# Altium PCB PCB2.PcbDoc
Units mm, origin at the board's own origin, x right, y up, seen from the top; angles counter-clockwise.
Board outline 40 x 60 mm, 4 copper layers (Top Layer 1, GND, PWR, Bottom Layer 1), stack 1.564 mm thick; 9 components, 9 nets, 136 pads, 0 vias.
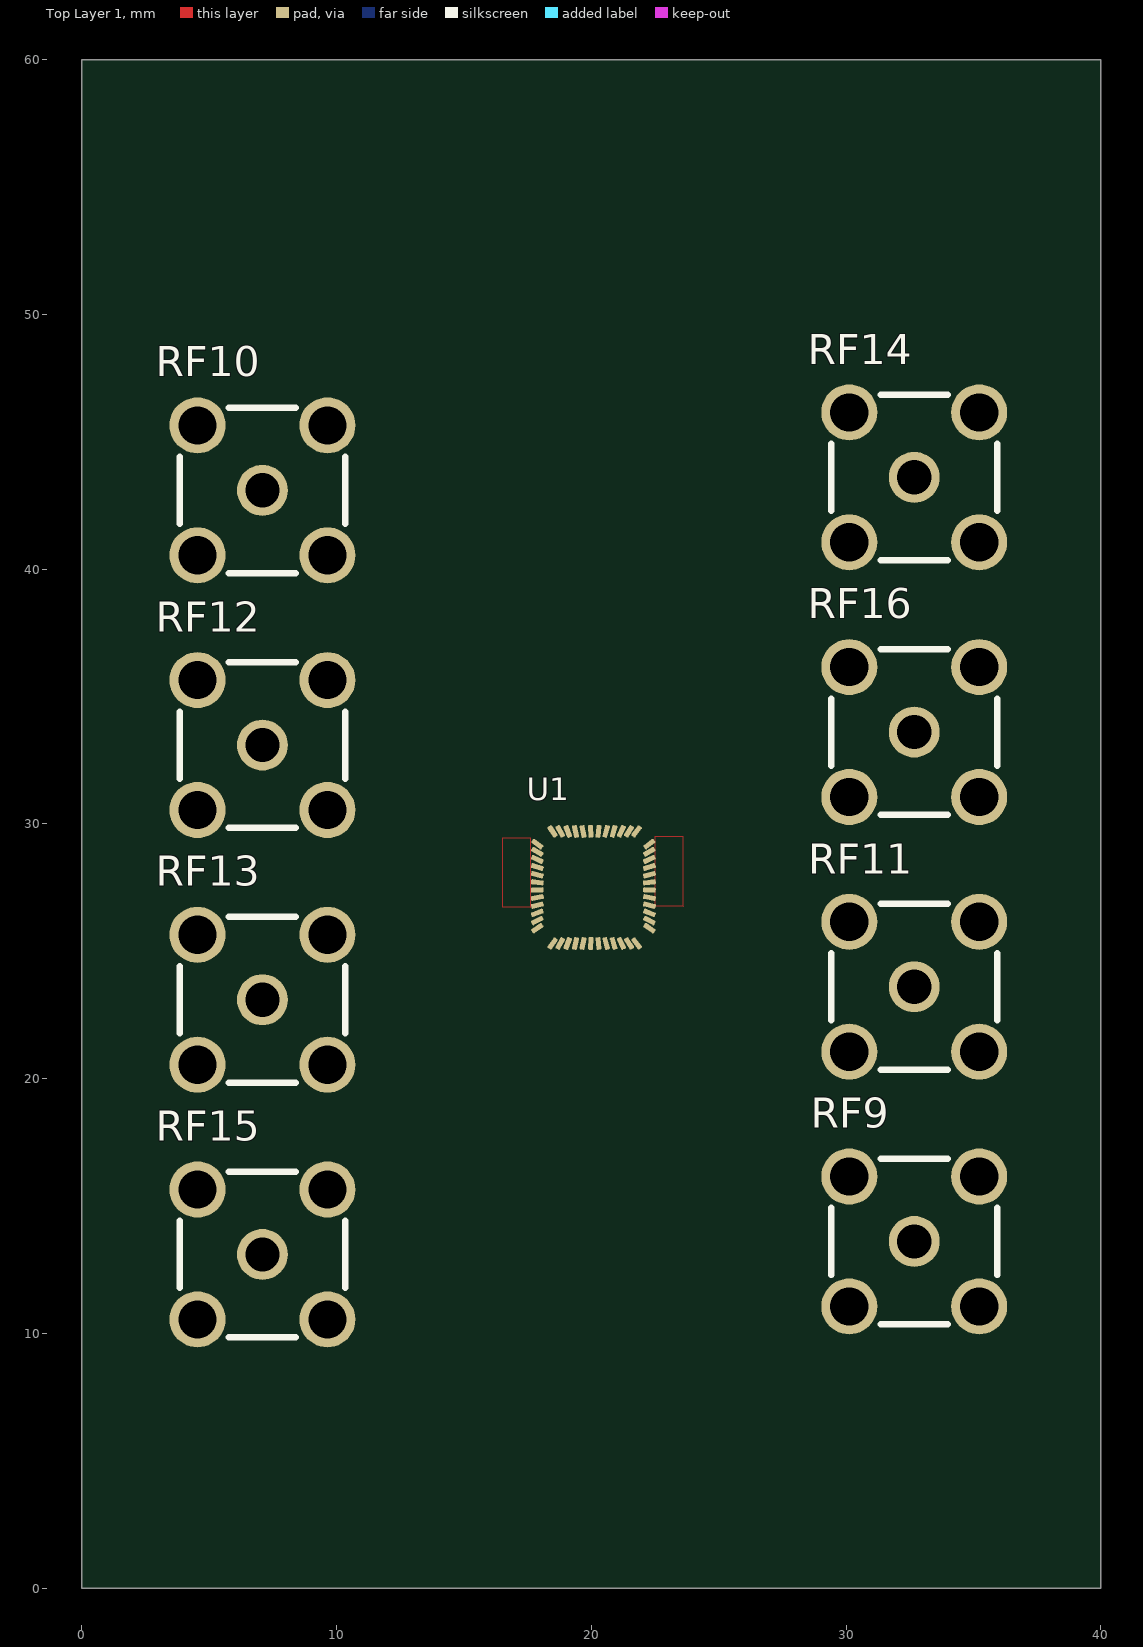
[diagram p0: Top Layer 1 view]
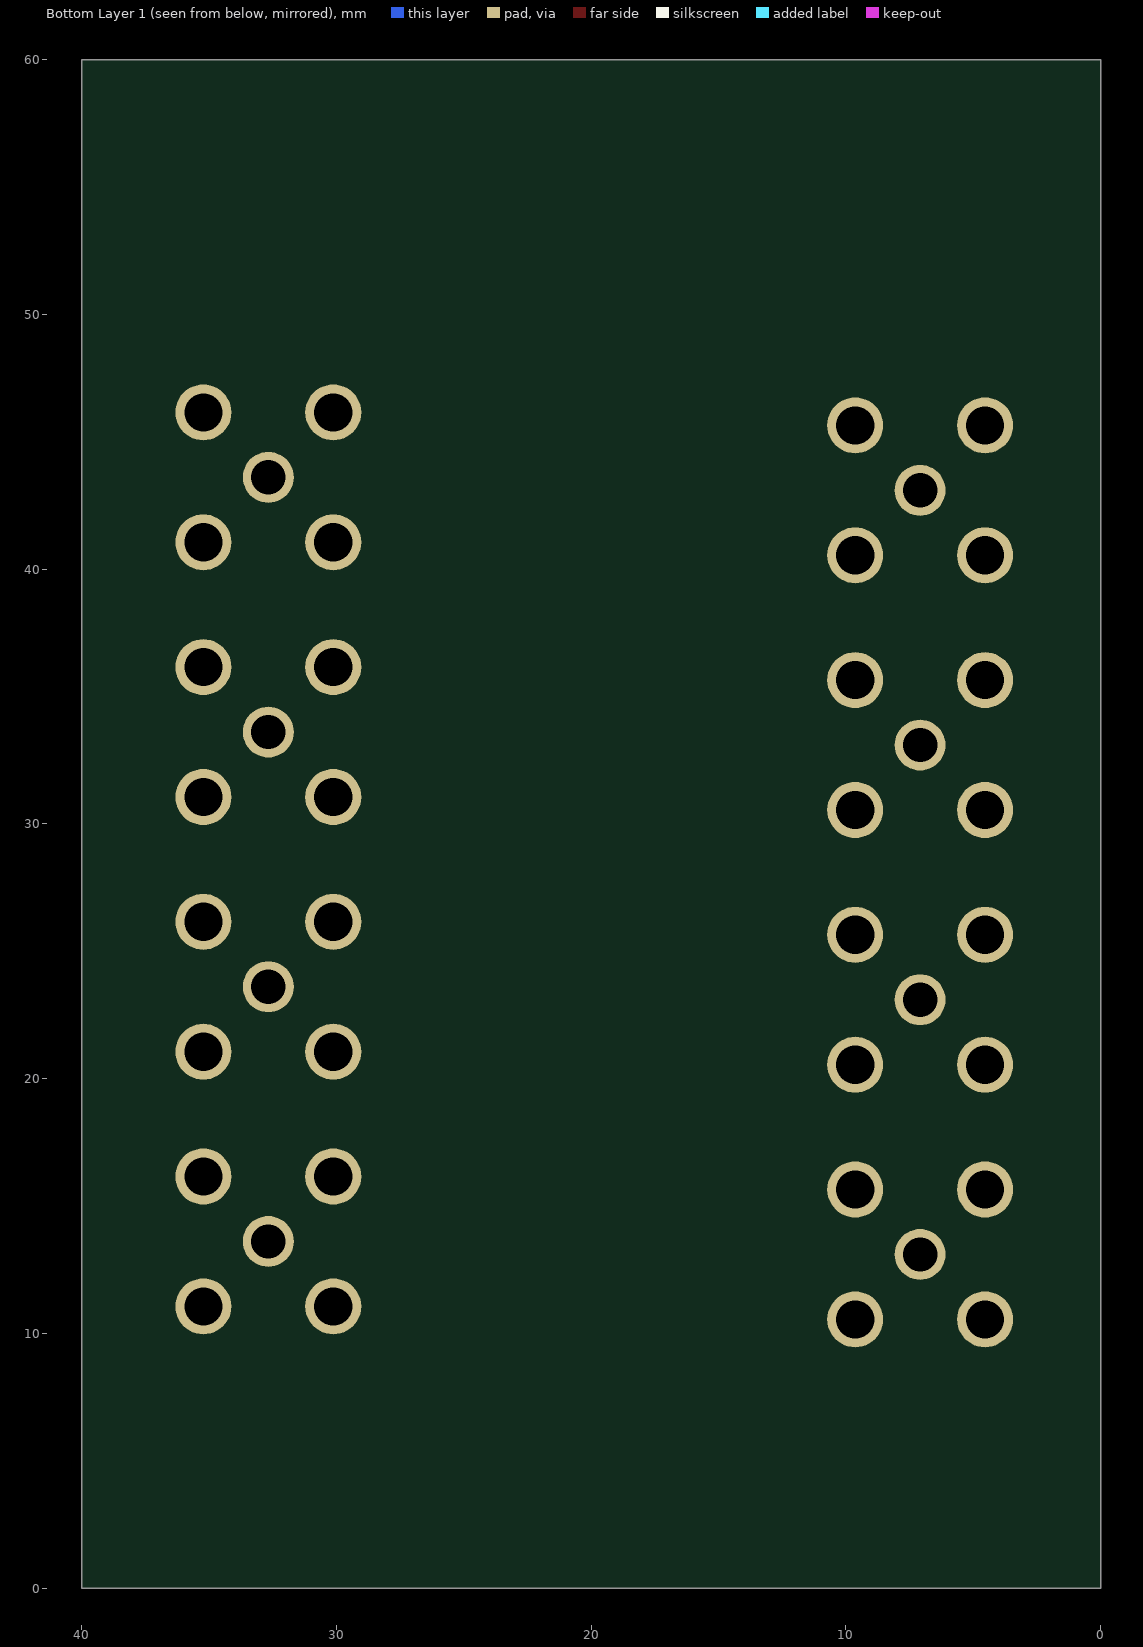
[diagram p1: Bottom Layer 1 view, seen from below]
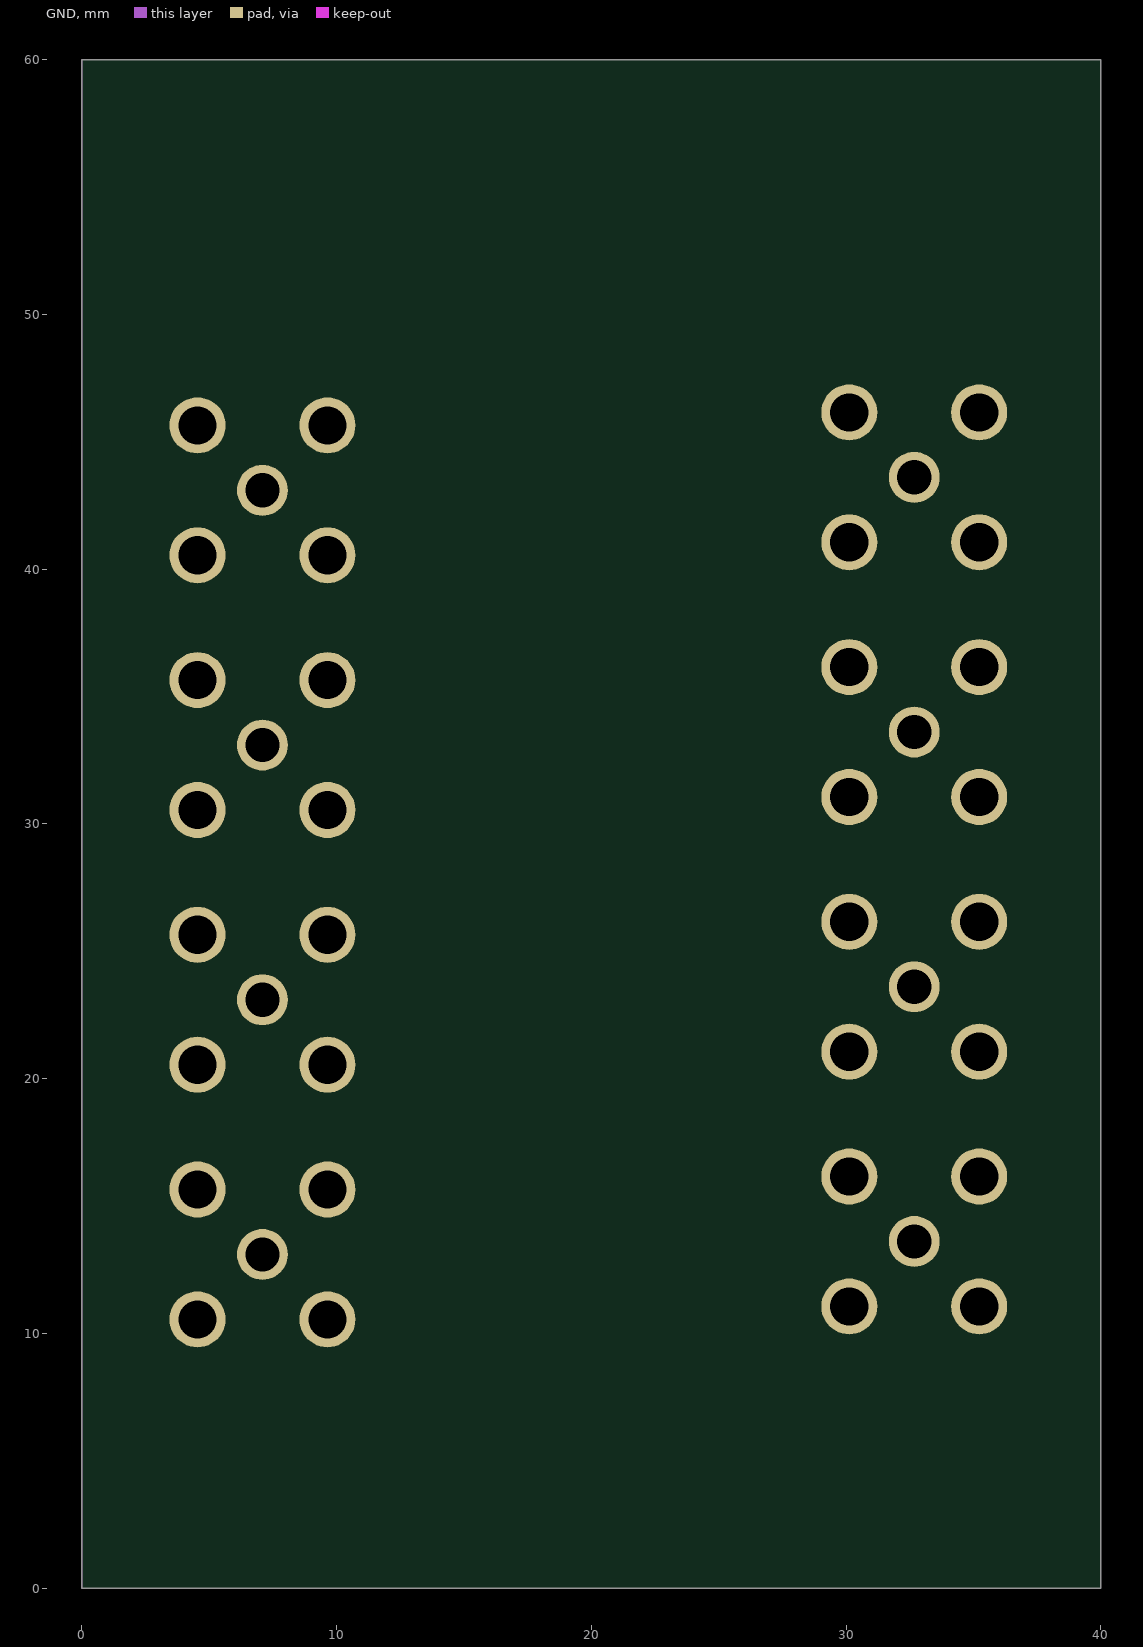
[diagram p2: GND]
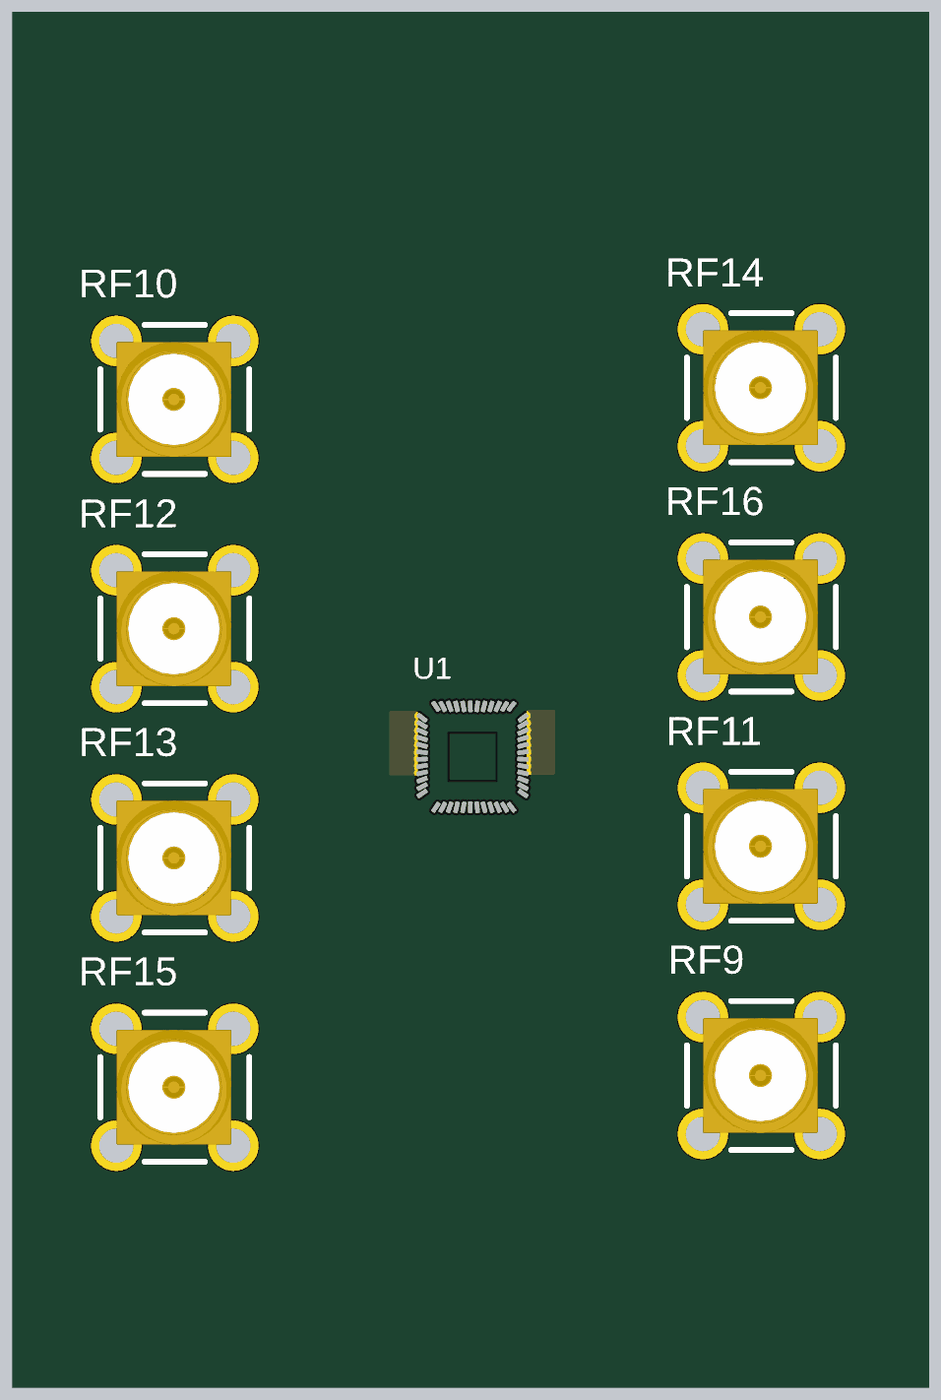
[diagram p3: 3D render of the assembled board from above, using the file's embedded part models]

## Layer stack, top to bottom
Top Solder: solder mask 0.0102, Solder Resist, Dk 3.5
Top Layer 1: signal copper 0.035
Dielectric 2: prepreg 0.0994, PP-006, Dk 4.1
GND: signal copper 0.0152
Dielectric 1: dielectric 1.265, FR-4, Dk 4.8
PWR: signal copper 0.0152
Dielectric 3: prepreg 0.0994, PP-006, Dk 4.1
Bottom Layer 1: signal copper 0.035
Bottom Solder: solder mask 0.0102, Solder Resist, Dk 3.5

## Board outline
0,0 0,60 40,60 40,0

## Design rules (kind name [scope] priority, off if disabled: settings)
Clearance [All] p1: gap=0.001 ignorepadtopadclearanceinfootprint=FALSE
DiffPairsRouting [All] p1: maxlimit=0.254 minlimit=0.203 mostfreqgap=0.203 toplayer_minwidth=0.001 toplayer_maxwidth=0.124 toplayer_prefwidth=0.124 midlayer1_minwidth=0.001 midlayer1_maxwidth=0.124 midlayer1_prefwidth=0.124 midlayer2_minwidth=0.001 midlayer2_maxwidth=0.124 midlayer2_prefwidth=0.124 bottomlayer_minwidth=0.001 bottomlayer_maxwidth=0.124 bottomlayer_prefwidth=0.124 maxuncoupledlength=12.7
PlaneConnect [All] p1: planeconnectstyle=Direct reliefexpansion=0.508 reliefentries=4 reliefconductorwidth=0.254 reliefairgap=0.254
PolygonConnect [All] p1: connectstyle=Direct reliefconductorwidth=0.254 reliefentries=4 polygonreliefangle="90 Angle" airgapwidth=0.254
RoutingVias [All] p1: holewidth=0.711 width=1.27 viastyle="Through Hole" minholewidth=0.08 minwidth=0.1 maxholewidth=0.711 maxwidth=1.27
SolderMaskExpansion [All] p1: expansion=0.102 istentingtop=FALSE
SupplyNets "Schematic Supply Nets" [InNet('GND')] p1: voltage=0.000
Width SMA [All] p1: maxlimit=0.156 minlimit=0.156 preferedwidth=0.156
Width [All] p2: maxlimit=0.254 minlimit=0.1 preferedwidth=0.254
28 further rules are at their usual default settings.

## Classes and differential pairs
differential pair R2: +R2_P -R2_N
differential pair R1: +R1_P -R1_N

## Components (designator, comment, footprint, x,y, rotation, side; value= is the part's Value field where it differs from the comment)
RF9 "BWSMA-KE-Z001" SMA-TH_BWSMA-KE-Z001 32.68,13.61 r0 top
RF10 "BWSMA-KE-Z001" SMA-TH_BWSMA-KE-Z001 7.09,43.1 r0 top
RF11 "BWSMA-KE-Z001" SMA-TH_BWSMA-KE-Z001 32.68,23.61 r0 top
RF12 "BWSMA-KE-Z001" SMA-TH_BWSMA-KE-Z001 7.09,33.1 r0 top
RF13 "BWSMA-KE-Z001" SMA-TH_BWSMA-KE-Z001 7.09,23.1 r0 top
RF14 "BWSMA-KE-Z001" SMA-TH_BWSMA-KE-Z001 32.68,43.61 r0 top
RF15 "BWSMA-KE-Z001" SMA-TH_BWSMA-KE-Z001 7.09,13.1 r0 top
RF16 "BWSMA-KE-Z001" SMA-TH_BWSMA-KE-Z001 32.68,33.61 r0 top
U1 "chip2" CHIP2 19.18,28.21 r0 top

## Footprints (in the part's own frame and the unit in brackets; to place one, negate y for a bottom-side part, rotate by r counter-clockwise, add the part's x,y. Pads: shape width x height; smd on the part's side, far side on the other; paste and mask are expansions set on the pad)
CHIP2 [mm]
  rrect50% 0.5x0.2 smd rot 142.43: 1(-1.3,1)
  rect 0.1x0.05 on Mech16 mask+0.102: 1(0,0) 2(0,-0.1) 3(0,-0.2) 4(0,-0.3) 5(0,-0.55) 6(0,-0.65) 7(0,-0.75) 8(0,-0.85) 9(0,-1.1) 10(0,-1.2) 11(0,-1.3) 12(0,-1.4) 25(1.8,-1.4) 26(1.8,-1.3) 27(1.8,-1.2) 28(1.8,-1.1) 29(1.8,-0.85) 30(1.8,-0.75) 31(1.8,-0.65) 32(1.8,-0.55) 33(1.8,-0.3) 34(1.8,-0.2) 35(1.8,-0.1) 36(1.8,0)
  rrect50% 0.5x0.2 smd rot 148.27: 2(-1.3,0.7)
  rrect50% 0.5x0.2 smd rot 155.09: 3(-1.3,0.4)
  rrect50% 0.5x0.2 smd rot 162.81: 4(-1.3,0.1)
  rrect50% 0.5x0.2 smd rot 164.93: 5(-1.3,-0.2)
  rrect50% 0.5x0.2 smd rot 173.42: 6(-1.3,-0.5)
  rrect50% 0.5x0.2 smd rot 2.12: 7(-1.3,-0.8)
  rrect50% 0.5x0.2 smd rot 10.71: 8(-1.3,-1.1)
  rrect50% 0.5x0.2 smd rot 12.99: 9(-1.3,-1.4)
  rrect50% 0.5x0.2 smd rot 21.02: 10(-1.3,-1.7)
  rrect50% 0.5x0.2 smd rot 28.16: 11(-1.3,-2)
  rrect50% 0.5x0.2 smd rot 34.76: 12(-1.3,-2.3)
  rrect50% 0.5x0.2 smd rot 55.3: 13(-0.7,-2.9)
  rect 0.05x0.1 on Mech16 mask+0.102: 13(0.2,-1.6) 14(0.3,-1.6) 15(0.4,-1.6) 16(0.5,-1.6) 17(0.75,-1.6) 18(0.85,-1.6) 19(0.95,-1.6) 20(1.05,-1.6) 21(1.3,-1.6) 22(1.4,-1.6) 23(1.5,-1.6) 24(1.6,-1.6) 37(1.6,0.2) 38(1.5,0.2) 39(1.4,0.2) 40(1.3,0.2) 41(1.05,0.2) 42(0.95,0.2) 43(0.85,0.2) 44(0.75,0.2) 45(0.5,0.2) 46(0.4,0.2) 47(0.3,0.2) 48(0.2,0.2)
  rrect50% 0.5x0.2 smd rot 61.8: 14(-0.4,-2.9)
  rrect50% 0.5x0.2 smd rot 68.98: 15(-0.1,-2.9)
  rrect50% 0.5x0.2 smd rot 76.84: 16(0.2,-2.9)
  rrect50% 0.5x0.2 smd rot 79.11: 17(0.5,-2.9)
  rrect50% 0.5x0.2 smd rot 87.95: 18(0.8,-2.9)
  rrect50% 0.5x0.2 smd rot 96.78: 19(1.1,-2.9)
  rrect50% 0.5x0.2 smd rot 105.2: 20(1.4,-2.9)
  rrect50% 0.5x0.2 smd rot 107.1: 21(1.7,-2.9)
  rrect50% 0.5x0.2 smd rot 115.07: 22(2,-2.9)
  rrect50% 0.5x0.2 smd rot 121.65: 23(2.3,-2.9)
  rrect50% 0.5x0.2 smd rot 127.62: 24(2.6,-2.9)
  rrect50% 0.5x0.2 smd rot 145.3: 25(3.1,-2.3)
  rrect50% 0.5x0.2 smd rot 151.55: 26(3.1,-2)
  rrect50% 0.5x0.2 smd rot 159.02: 27(3.1,-1.7)
  rrect50% 0.5x0.2 smd rot 167.01: 28(3.1,-1.4)
  rrect50% 0.5x0.2 smd rot 169.38: 29(3.1,-1.1)
  rrect50% 0.5x0.2 smd rot 177.71: 30(3.1,-0.8)
  rrect50% 0.5x0.2 smd rot 6.73: 31(3.1,-0.5)
  rrect50% 0.5x0.2 smd rot 15.15: 32(3.1,-0.2)
  rrect50% 0.5x0.2 smd rot 17.38: 33(3.1,0.1)
  rrect50% 0.5x0.2 smd rot 24.72: 34(3.1,0.4)
  rrect50% 0.5x0.2 smd rot 31.7: 35(3.1,0.7)
  rrect50% 0.5x0.2 smd rot 37.79: 36(3.1,1)
  rrect50% 0.5x0.2 smd rot 52.43: 37(2.6,1.5)
  rrect50% 0.5x0.2 smd rot 58.24: 38(2.3,1.5)
  rrect50% 0.5x0.2 smd rot 65.21: 39(2,1.5)
  rrect50% 0.5x0.2 smd rot 72.94: 40(1.7,1.5)
  rrect50% 0.5x0.2 smd rot 74.99: 41(1.4,1.5)
  rrect50% 0.5x0.2 smd rot 83.25: 42(1.1,1.5)
  rrect50% 0.5x0.2 smd rot 92.15: 43(0.8,1.5)
  rrect50% 0.5x0.2 smd rot 100.84: 44(0.5,1.5)
  rrect50% 0.5x0.2 smd rot 102.99: 45(0.2,1.5)
  rrect50% 0.5x0.2 smd rot 111.03: 46(-0.1,1.5)
  rrect50% 0.5x0.2 smd rot 118.1: 47(-0.4,1.5)
  rrect50% 0.5x0.2 smd rot 124.48: 48(-0.7,1.5)
  body extent -0.1,-1.7 1.9,0.3, height 0.2
SMA-TH_BWSMA-KE-Z001 [mm]
  round 2.2 hole 1.5 paste-2539.97 mask+0.051: 1(-2.55,-2.55) 2(-2.55,2.55) 3(2.55,2.55)
  round 2.2 hole 1.5 copper offset 0,0 paste-2539.97 mask+0.051: 4(2.55,-2.55)
  round 2 hole 1.35 paste-2539.97 mask+0.051: 5(0,0)
  silkscreen extent -3.25,-3.25 3.25,3.25, body extent -2.54,-2.5 2.46,2.5, height 8

## Part data
RF9 RF10 RF11 RF12 RF13 RF14 RF15 RF16: library part BWSMA-KE-Z001_C496549, Frequency-Max=-, JLCPCB Part Class="Extended Part", LCSC Part Name="内孔 SMA 正脚", Manufacturer="BAT WIRELESS(蝙蝠无线)", Operating Temperature Range=-65℃~+165℃, Add into BOM=yes, Connector Type=板端, Contact Material=-, Contact Plating=-, Convert to PCB=yes, Datasheet=https://atta.szlcsc.com/upload/public/pdf/source/20221228/40BF41E56A06003A0210E1785CA66EA6.pdf, Device=BWSMA-KE-Z001_C496549, Impedance=50Ω, Interface Diameter=-, Interface Length/Height=-, Interface Type=内孔, Manufacturer Part=BWSMA-KE-Z001, Number of Ports=1, RF Series=SMA, Soldering Temperature(Max)=-, Style=正脚, Supplier=LCSC, Supplier Footprint=插件, Supplier Part=C496549, Symbol=BWSMA-KE-Z001

## Nets (pads, with @x,y where several pads share a name; then routed paths per layer and width w, separated by ;. In a path a pad name is that pad's centre, name@x,y a point inside that pad or via, vN(x,y) a via of type N, cw(c..) or ccw(c..) an arc to the next point about the centre after c; other vN are vias at no path point)
GND: RF9.1 RF9.2 RF9.3 RF9.4 RF10.1 RF10.2 RF10.3 RF10.4 RF11.1 RF11.2 RF11.3 RF11.4 RF12.1 RF12.2 RF12.3 RF12.4 RF13.1 RF13.2 RF13.3 RF13.4 RF14.1 RF14.2 RF14.3 RF14.4 RF15.1 RF15.2 RF15.3 RF15.4 RF16.1 RF16.2 RF16.3 RF16.4
R1_N: RF12.5
R1_P: RF10.5
R2_N: RF14.5
R2_P: RF16.5
R5: RF9.5
R6: RF11.5
R7: RF13.5
R8: RF15.5 | length 0.2
  Top Layer 1 w0.156: RF15.5 cw(c7.19,13.1) RF15.5@7.19,13.2
pads on no net: U1.1 U1.2 U1.3 U1.4 U1.5 U1.6 U1.7 U1.8 U1.9 U1.10 U1.11 U1.12 U1.13 U1.14 U1.15 U1.16 U1.17 U1.18 U1.19 U1.20 U1.21 U1.22 U1.23 U1.24 U1.25 U1.26 U1.27 U1.28 U1.29 U1.30 U1.31 U1.32 U1.33 U1.34 U1.35 U1.36 U1.37 U1.38 U1.39 U1.40 U1.41 U1.42 U1.43 U1.44 U1.45 U1.46 U1.47 U1.48

## Polygon pours and split planes (outlines as drawn)
GND on Top Layer 1 "NONET_L01_P006" (hatched Horizontal grid 0.102 track 0.127, remove dead copper, shelved, pour order 6): 22.5,29.49 22.5,26.8 23.59,26.8 23.61,26.78 23.62,26.79 23.62,29.49
GND on Top Layer 1 "NONET_L01_P005" (hatched Horizontal grid 0.102 track 0.127, remove dead copper, shelved, pour order 5): 16.51,29.45 16.51,26.76 17.6,26.76 17.62,26.74 17.63,26.75 17.63,29.45
GND on GND "NONET_L02_P000" (hatched Horizontal grid 0.102 track 0.127, remove dead copper, shelved, pour order 0): 0,0 40,0 40,60 0,60

## Silkscreen, mask and mechanical layers (free items; w line width, h text height)
Mechanical 1:
  the board outline again, w0.254